# EAGLE board lv1-imu-gyro-1 (EAGLE 3.55)
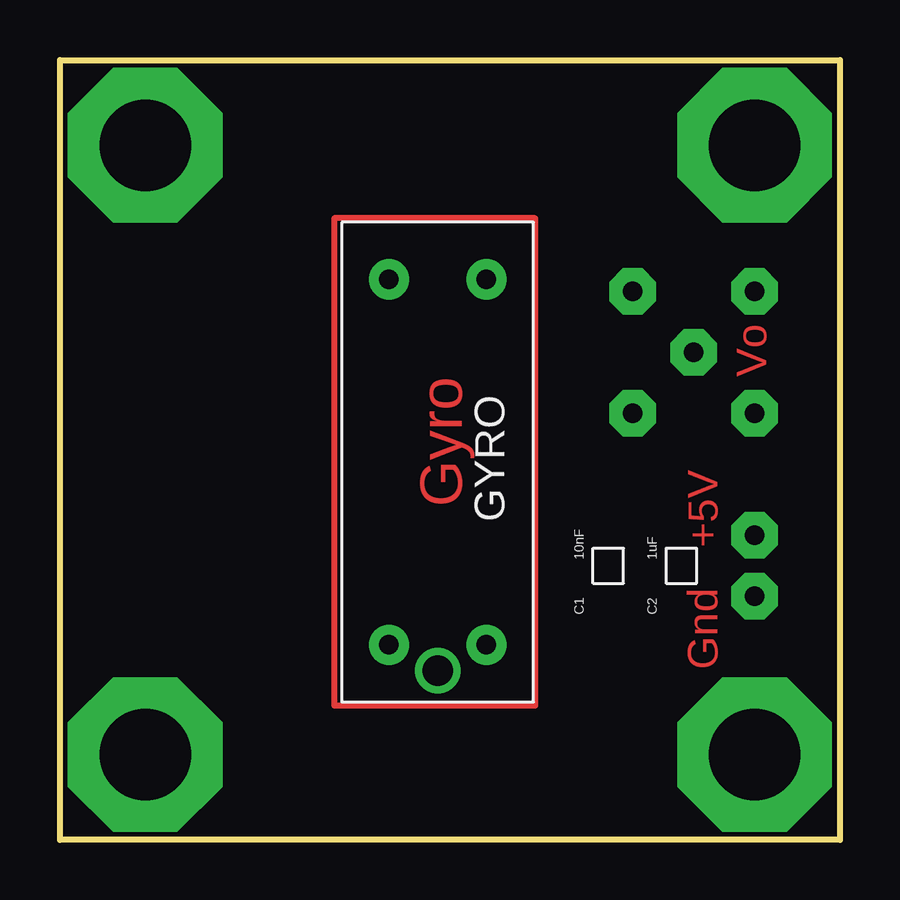
[diagram p0: board, top side]
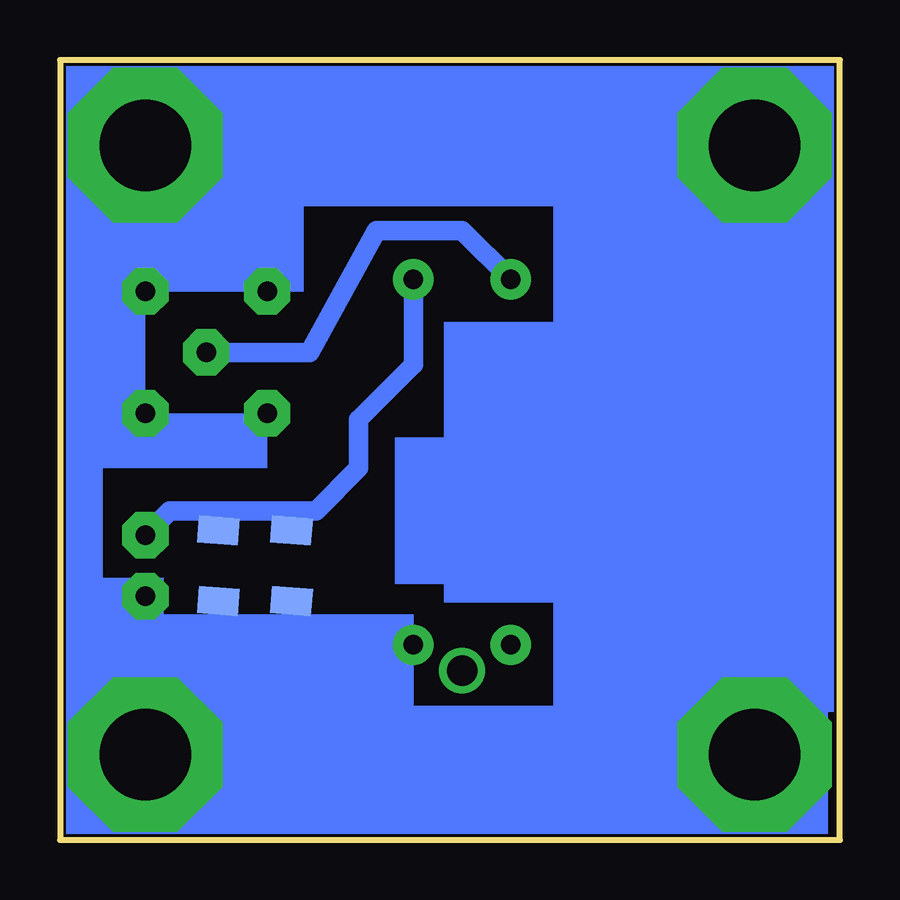
[diagram p1: board, bottom side, seen from below]

Size 32.51 x 32.51 mm. Coordinates in mm from the lower left corner, seen from the top.
Outline: 0,0 0,32.51 32.51,32.51 32.51,0 0,0
Copper layers used: Top, Bottom

## Footprints (pad centres in the part's own frame; a part is rotated, then mirrored left to right if it is on the bottom)
06B = smd 1.143 x 1.702 rotated 4.4 bottom:  1.473,0 | smd 1.143 x 1.702 rotated 4.3 bottom:  -1.473,0
-16DO = drill 1.27 pad 1.778 round:  8.7,0 | drill 0.813 pad 1.676 round:  7.62,2.032;  7.62,-2.032;  -7.62,2.032;  -7.62,-2.032

## Placement (x,y rotation side)
C1  10nF  [06B]  22.86,11.43 90 top
C2  1uF  [06B]  25.91,11.43 90 top
GYRO  [-16DO]  15.75,15.75 270 top

## Library data of the parts
C1 C2 = SMD
GYRO = AESS

## Nets
S$12: GYRO.
S$14: GYRO.

## Tracks (layer width: path | path; a pad name or v marks a point on that pad's centre or on a via)
S$4  (via drill 3.81 pad 6.45)
  other vias: 3.56,3.56
S$5  (via drill 3.81 pad 6.45)
  other vias: 3.56,28.96
S$6  (via drill 0.81 pad 1.93)
  other vias: 23.88,17.78
S$8  (via drill 3.81 pad 6.45)
  other vias: 28.96,28.96
S$9  (via drill 3.81 pad 6.45)
  other vias: 28.96,3.56
S$10  (via drill 0.81 pad 1.93)
  other vias: 28.96,10.16
S$11
  Top 0.254: 19.81,5.59 11.43,5.59 11.43,25.91 19.81,25.91 19.81,5.59
S$12  (via drill 0.81 pad 1.93)
  Bottom 0.813: 17.78,23.37 17.78,19.81 20.07,17.53 20.07,15.49 21.84,13.72 27.94,13.72 v28.96,12.7
S$13  (via drill 0.81 pad 1.93)
  other vias: 28.96,17.78
S$14  (via drill 0.81 pad 1.93)
  Bottom 0.813: GYRO. 15.75,25.4 19.3,25.4 22.1,20.32 v26.42,20.32
S$15  (via drill 0.81 pad 1.93)
  other vias: 28.96,22.86
S$16  (via drill 0.81 pad 1.93)
  other vias: 23.88,22.86
(copper drawn outside any net)
  shapes: Bottom area x16

## Text on the board
Top: Gyro | Vo | +5V | Gnd